# EAGLE board test2 (EAGLE 7.6.0)
REV: B

Size 50.8 x 22.86 mm. Coordinates in mm from the lower left corner, seen from the top.
Outline: 0,2.54 0,20.32 arc-90 2.54,22.86 48.26,22.86 arc-90 50.8,20.32 50.8,16.76 49.78,15.75 49.78,4.57 50.8,3.56 50.8,2.54 arc-90 48.26,0 2.54,0 arc-90 0,2.54
Copper layers (1*16): Top 0.035mm / dielectric 1.5mm / Bottom 0.035mm
Design rules "adafruit *": minimum track width 8mil, minimum drill 15.5mil, track to track 8mil, track to pad 8mil, pad to pad 8mil, via to via 8mil, smd to smd 8mil, copper to edge 10mil, drill to drill 8mil, minimum pad ring 10mil, minimum via ring 8mil, stop-mask expansion 2mil, vias tented up to drill 20mil, thermal gap 10mil

## Footprints (pad centres in the part's own frame; a part is rotated, then mirrored left to right if it is on the bottom)
CR1220-2 = smd 4 x 2: + 8.29,0; - -7.6,0 | hole 1.5: -3.5,0; 3.95,0
0805-NO = smd 1.24 x 1.5: 1 -0.95,0; 2 0.95,0
FIDUCIAL_1MM = smd 1 x 1: 1 0,0
SOIC8_150MIL = smd 0.6 x 2.2: 1 -1.905,-2.6; 2 -0.635,-2.6; 3 0.635,-2.6; 4 1.905,-2.6; 5 1.905,2.6; 6 0.635,2.6; 7 -0.635,2.6; 8 -1.905,2.6
1X01_ROUND = drill 1 pad 1.676: 1 0,0
1X11_ROUND = drill 1 pad 1.676: 1 -12.7,0; 2 -10.16,0; 3 -7.62,0; 4 -5.08,0; 5 -2.54,0; 6 0,0; 7 2.54,0; 8 5.08,0; 9 7.62,0; 10 10.16,0; 11 12.7,0
1X16_ROUND = drill 1 pad 1.676: 1 -19.05,0; 2 -16.51,0; 3 -13.97,0; 4 -11.43,0; 5 -8.89,0; 6 -6.35,0; 7 -3.81,0; 8 -1.27,0; 9 1.27,0; 10 3.81,0; 11 6.35,0; 12 8.89,0; 13 11.43,0; 14 13.97,0; 15 16.51,0; 16 19.05,0
0603-NO = smd 1.075 x 1: 1 -0.85,0; 2 0.85,0
SOLDERJUMPER_CLOSEDWIRE = smd 1.168 x 1.6: 1 -0.762,0; 2 0.762,0 | smd 0.635 x 0.203: WIRE 0,0
BTN_KMR2_4.6X2.8 = smd 0.9 x 0.9: A 2.05,0.8; A' -2.05,0.8; B 2.05,-0.8; B' -2.05,-0.8
MICROSD = smd 0.7 x 1.5: 1 9,-10.64; 2 7.9,-10.24; 3 6.8,-10.64; 4 5.7,-11.04; 5 4.6,-10.64; 6 3.5,-11.04; 7 2.4,-10.64; 8 1.3,-10.64 | smd 1.8 x 1.4: CD1 2,-0.44; CD2 8,-0.44 | smd 1.4 x 1.9: MT1 0.4,-13.54; MT2 13.6,-14.44
CRYSTAL_8X3.8 = smd 1.3 x 1.9: P$1 -2.75,-1.6; P$2 2.75,-1.6; P$3 2.75,1.6; P$4 -2.75,1.6

## Placement (x,y rotation side)
B1  cr1220  [CR1220-2]  10.03,12.83 0 top
C1  10uF  [0805-NO]  31.24,6.73 180 top
C2  10uF  [0805-NO]  24.77,6.1 180 top
FID1  FIDUCIAL_1MM  [FIDUCIAL_1MM]  47.37,14.99 0 top
FID2  FIDUCIAL_1MM  [FIDUCIAL_1MM]  4.83,4.83 0 top
IC1  PCF8523T  [SOIC8_150MIL]  27.18,10.29 270 top
INT1  [1X01_ROUND]  20.7,10.41 0 top
JP1  [1X11_ROUND]  31.75,19.56 0 top
JP2  [1X16_ROUND]  25.4,3.3 180 top
JP3  [1X01_ROUND]  19.05,17.4 0 top
R1  10K  [0603-NO]  28.7,6.1 270 top
R2  10K  [0603-NO]  27.3,6.1 270 top
R3  100K  [0603-NO]  32.13,12.7 270 top
R4  1K  [0603-NO]  32.13,9.65 270 top
SDCS  [1X01_ROUND]  32.38,15.24 0 top
SJ1  [SOLDERJUMPER_CLOSEDWIRE]  31.62,17.53 0 top
SW1  KMR2  [BTN_KMR2_4.6X2.8]  20.45,7.75 180 top
X4  microsd  [MICROSD]  33.78,4.32 90 top
Y1  32khz  [CRYSTAL_8X3.8]  25.15,15.75 0 top

## Library data of the parts
B1 C1 C2 IC1 INT1 JP1-JP3 R1-R4 SDCS SJ1 SW1 X4 Y1 = microbuilder
FID1 FID2 = microbuilder; BOM: EXCLUDE

## Nets
+3V3: C2.1 JP2.15 R1.2 R2.2 R3.2 R4.1 X4.4
A: JP2.12
AREF: JP2.14
B: JP2.11
C: JP2.10
CR1220: B1.+ IC1.3
CS: JP1.6 SJ1.1
D: JP2.9
E: JP2.8
EN: JP1.1
F: JP2.7
G: JP2.1
GND: B1.- C1.2 C2.2 IC1.4 JP2.13 SW1.A SW1.A' X4.6 X4.MT1 X4.MT2
H: JP1.9
I: JP1.8
INT1: IC1.7 INT1.1
J: JP1.7
L: JP1.5
M: JP1.4
MISO: JP2.4 X4.7
MOSI: JP2.5 X4.3
N: JP1.3
N$1: C1.1 IC1.8 R4.2
N$7: IC1.1 Y1.P$4
N$8: IC1.2 Y1.P$1
RESET: JP2.16 SW1.B SW1.B'
RX: JP2.3
SCK: JP2.6 X4.5
SCL: IC1.6 JP1.10 R2.1
SD_CS: R3.1 SDCS.1 SJ1.2 X4.2
SDA: IC1.5 JP1.11 R1.1
TX: JP2.2
USB: JP1.2
VBAT: JP3.1

## Tracks (layer width: path | path; a pad name or v marks a point on that pad's centre or on a via)
+3V3  (6 unrouted)
CR1220  (1 unrouted)
CS  (1 unrouted)
GND  (9 unrouted)
INT1  (1 unrouted)
MISO  (1 unrouted)
MOSI  (1 unrouted)
N$1  (2 unrouted)
N$7  (1 unrouted)
N$8  (1 unrouted)
RESET  (2 unrouted)
SCK  (1 unrouted)
SCL  (2 unrouted)
SD_CS  (3 unrouted)
SDA  (2 unrouted)